# EAGLE board bmx160-breakout (EAGLE 9.6.2)
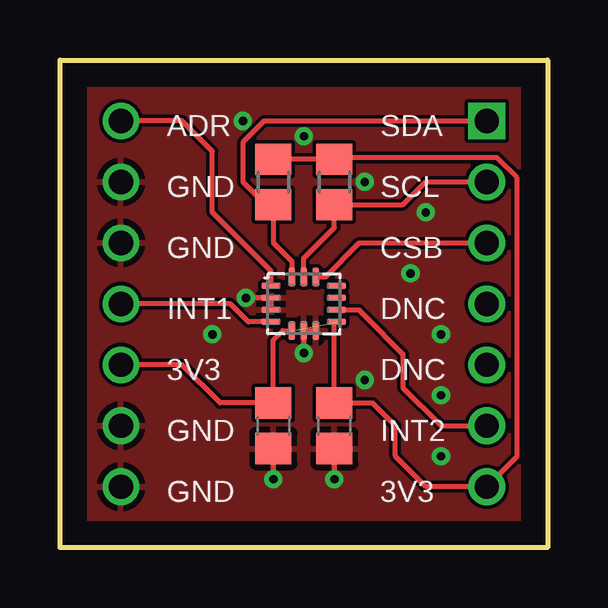
[diagram p0: board, top side]
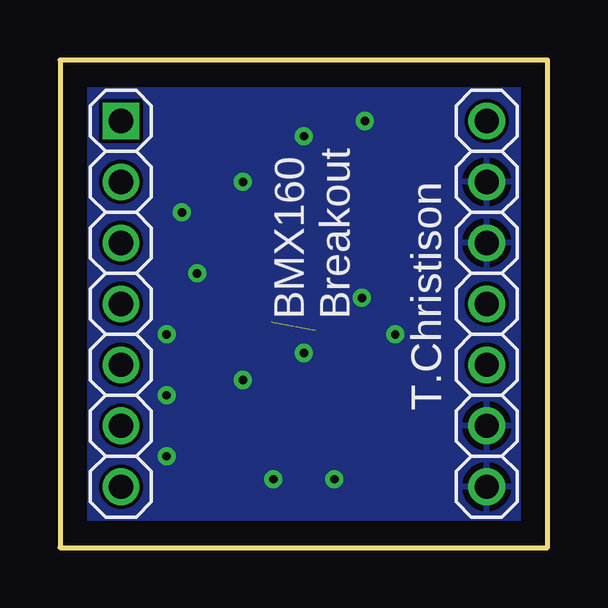
[diagram p1: board, bottom side, seen from below]

Size 20.32 x 20.32 mm. Coordinates in mm from the lower left corner, seen from the top.
Outline: 0,20.32 20.32,20.32 20.32,0 0,0 0,20.32
Copper layers (1*16): Top 0.035mm / dielectric 1.5mm / Bottom 0.035mm
Design rules "default": minimum track width 6mil, minimum drill 0.35mm, track to track 6mil, track to pad 6mil, pad to pad 6mil, via to via 6mil, smd to smd 6mil, copper to edge 40mil, drill to drill 6mil, minimum pad ring 10mil, minimum via ring 8mil, stop-mask expansion 4mil, vias tented up to drill 0mil, thermal gap 10mil

## Footprints (pad centres in the part's own frame; a part is rotated, then mirrored left to right if it is on the bottom)
C0805 = smd 1.3 x 1.5: 1 -0.95,0; 2 0.95,0
1X07 = drill 1.016 square: 1 -7.62,0 | drill 1.016: 2 -5.08,0; 3 -2.54,0; 4 0,0; 5 2.54,0; 6 5.08,0; 7 7.62,0
1X07* = drill 1.016: 1 -7.62,0; 2 -5.08,0; 3 -2.54,0; 4 0,0; 5 2.54,0; 6 5.08,0; 7 7.62,0
R0805 = smd 1.3 x 1.5: 1 -0.95,0; 2 0.95,0
QFN14P50_300X250X100L47X25N = smd 0.79 x 0.27: 1 -1.365,0.75; 2 -1.365,0.25; 3 -1.365,-0.25; 4 -1.365,-0.75; 8 1.365,-0.75; 9 1.365,-0.25; 10 1.365,0.25; 11 1.365,0.75 | smd 0.27 x 0.79: 5 -0.5,-1.115; 6 0,-1.115; 7 0.5,-1.115; 12 0.5,1.115; 13 0,1.115; 14 -0.5,1.115

## Placement (x,y rotation side)
C1  0.1uF  [C0805]  11.43,5.08 270 top
C2  0.1uF  [C0805]  8.89,5.08 270 top
JP1  [1X07]  17.78,10.16 270 bottom
JP2  [1X07*]  2.54,10.16 270 bottom
R1  4.7k  [R0805]  8.89,15.24 90 top
R2  4.7k  [R0805]  11.43,15.24 90 top
U1  BMX160  [QFN14P50_300X250X100L47X25N]  10.16,10.16 0 top

## Library data of the parts
C1 C2 = rcl; SPICEPREFIX: C
JP1 JP2 U1 = my_library
R1 R2 = rcl; SPICEPREFIX: R

## Nets
+3V3: C1.1 C2.1 JP1.7 JP2.5 R1.2 R2.2 U1.5 U1.8
CSB: JP1.3 U1.12
DNC1: JP1.4
DNC2: JP1.5
GND: C1.2 C2.2 JP2.2 JP2.3 JP2.6 JP2.7 U1.2 U1.3 U1.6 U1.7
INT1: JP2.4 U1.4
INT2: JP1.6 U1.9
SCL: JP1.2 R2.1 U1.13
SDA: JP1.1 R1.1 U1.14
SDO: JP2.1 U1.1

## Tracks (layer width: path | path; a pad name or v marks a point on that pad's centre or on a via)
+3V3  (2 unrouted)
  Top 0.203: R1.2 R2.2 11.5,16.26 18.2,16.26 19.05,15.41 19.05,3.81 JP1.7 15.24,2.54 13.97,3.81 13.97,5.08 13.02,6.03 C1.1 11.43,9.38 | U1.5 9.28,9.04 8.89,8.66 C2.1 6.67,6.03 5.08,7.62 JP2.5
CSB
  Top 0.203: U1.12 11.04,11.28 12.47,12.7 JP1.3
GND  (via drill 0.35)
  Top 0.203: v7.74,10.41 U1.2 U1.3 | C1.2 v11.43,2.85 | C2.2 v8.89,2.85 | U1.7 U1.6 v10.16,8.11
  other vias: 7.62,17.78 12.7,15.24 15.24,13.97 14.61,11.43 15.88,6.35 12.7,6.99 15.88,3.81 6.35,8.89 15.88,8.89 10.16,17.14
  pour Top: 0,20.32 20.32,20.32 20.32,0 0,0
  pour Bottom: 0,20.32 20.32,20.32 20.32,0 0,0
INT1
  Top 0.203: U1.4 7.85,9.41 7.1,10.16 JP2.4
INT2
  Top 0.203: U1.9 12.45,9.91 12.7,9.66 14.29,8.07 14.29,6.67 15.88,5.08 JP1.6
SCL
  Top 0.203: U1.13 10.16,12.06 11.43,13.34 R2.1 14.29,14.29 15.24,15.24 JP1.2
SDA
  Top 0.203: R1.1 8.89,13.97 | 8.89,13.97 8.89,12.7 9.66,11.93 U1.14 | 8.89,13.97 7.62,15.24 7.62,16.89 8.51,17.78 JP1.1
SDO
  Top 0.203: U1.1 8.79,11.53 6.35,13.97 6.35,16.51 5.08,17.78 JP2.1

## Text on the board
tPlace: ADR | SDA | GND | SCL | GND | CSB | INT1 | DNC | 3V3 | DNC | GND | INT2 | GND | 3V3
bPlace: Breakout | BMX160 | T.Christison